# EAGLE board board (EAGLE 6.5.0)
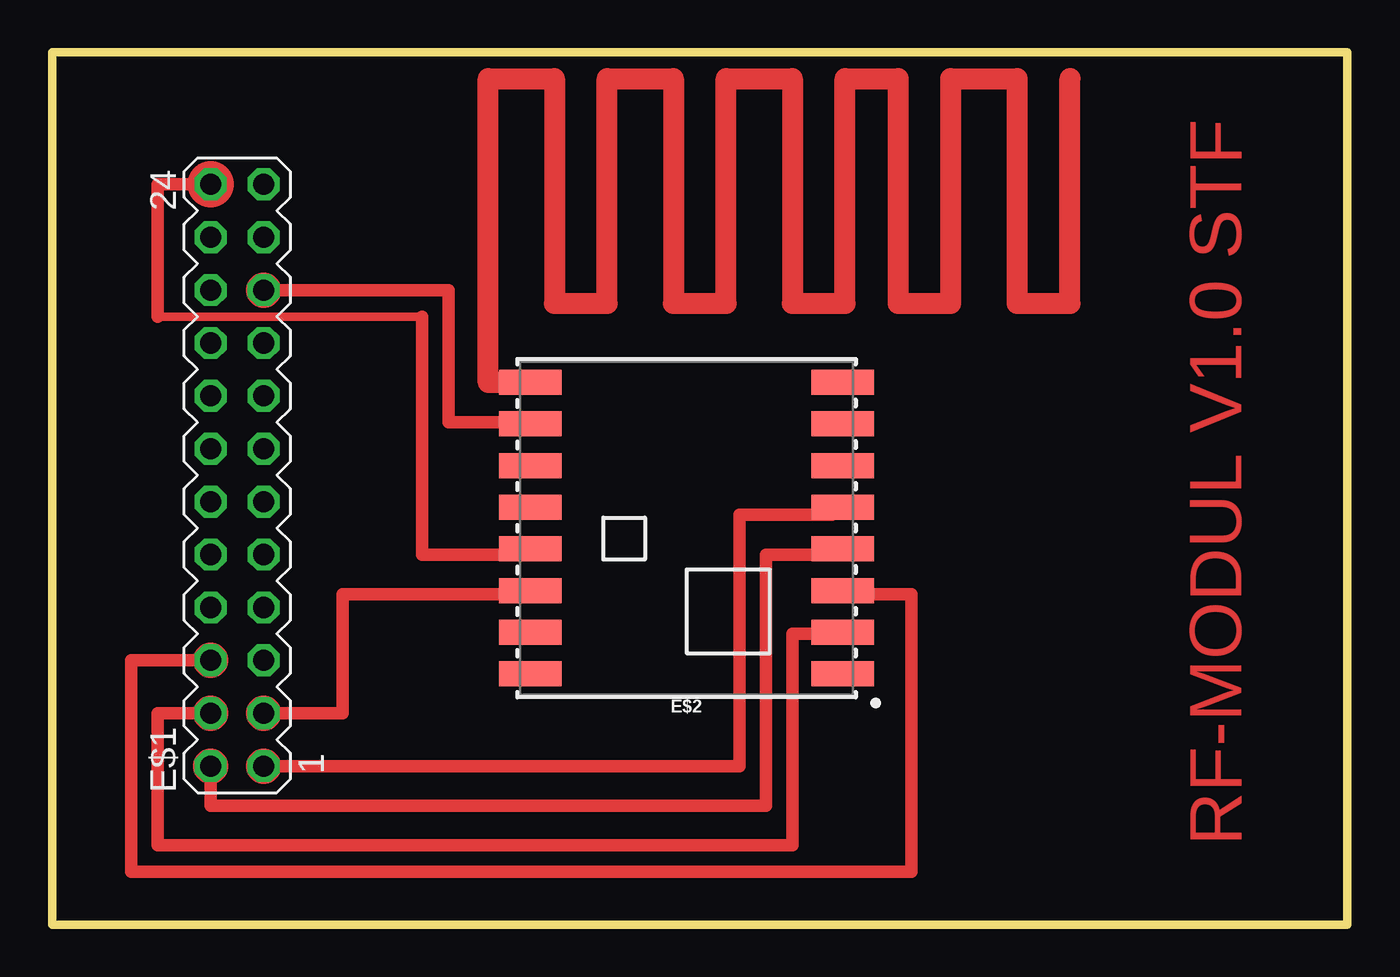
[diagram p0: board, top side]

Size 62.23 x 41.91 mm. Coordinates in mm from the lower left corner, seen from the top.
Outline: 0,41.91 0,0 62.23,0 62.23,41.91 0,41.91
Copper layers (1*16): Top 0.035mm / dielectric 1.5mm / Bottom 0.035mm
Design rules "default": minimum track width 10mil, minimum drill 24mil, track to track 8mil, track to pad 8mil, pad to pad 8mil, via to via 8mil, smd to smd 8mil, copper to edge 40mil, drill to drill 8mil, minimum pad ring 10mil, minimum via ring 8mil, stop-mask expansion 4mil, vias tented up to drill 0mil, thermal gap 10mil

## Footprints (pad centres in the part's own frame; a part is rotated, then mirrored left to right if it is on the bottom)
MA12-2 = drill 1.016 octagon: 1 -13.97,-1.27; 2 -13.97,1.27; 3 -11.43,-1.27; 4 -11.43,1.27; 5 -8.89,-1.27; 6 -8.89,1.27; 7 -6.35,-1.27; 8 -6.35,1.27; 9 -3.81,-1.27; 10 -3.81,1.27; 11 -1.27,-1.27; 12 -1.27,1.27; 13 1.27,-1.27; 14 1.27,1.27; 15 3.81,-1.27; 16 3.81,1.27; 17 6.35,-1.27; 18 6.35,1.27; 19 8.89,-1.27; 20 8.89,1.27; 21 11.43,-1.27; 22 11.43,1.27; 23 13.97,-1.27; 24 13.97,1.27
RFM69HCW-XXXS2 = smd 3 x 1.2: 1 -7.5,7; 2 -7.5,5; 3 -7.5,3; 4 -7.5,1; 5 -7.5,-1; 6 -7.5,-3; 7 -7.5,-5; 8 -7.5,-7; 9 7.5,-7; 10 7.5,-5; 11 7.5,-3; 12 7.5,-1; 13 7.5,1; 14 7.5,3; 15 7.5,5; 16 7.5,7

## Placement (x,y rotation side)
E$1  [MA12-2]  8.89,21.59 90 top
E$2  [RFM69HCW-XXXS2]  30.48,19.05 180 top

## Library data of the parts
E$1 = con-lstb
E$2 = SparkFun-RF

## Nets
S$2: E$1.19
S$3: E$1.24
S$4: E$1.3
S$5: E$1.1
S$6: E$1.2
S$7: E$1.4
S$8: E$1.6

## Tracks (layer width: path | path; a pad name or v marks a point on that pad's centre or on a via)
S$1
  Top 1.016: 22.86,26.04 20.96,26.04 20.96,40.64 24.13,40.64 24.13,29.84 26.67,29.84 26.67,40.64 29.85,40.64 29.85,29.84 32.39,29.84 32.39,40.64 35.56,40.64 35.56,29.84 38.1,29.84 38.1,40.64 40.64,40.64 40.64,29.84 43.18,29.84 43.18,40.64 46.36,40.64 46.36,29.84 48.89,29.84 48.89,40.64
S$2
  Top 0.61: 22.23,24.13 19.05,24.13 19.05,30.48 E$1.19
S$3
  Top 0.406: 17.78,29.21 5.08,29.21
  Top 0.61: 22.86,17.78 17.78,17.78 17.78,29.21 | 5.08,29.21 5.08,35.56 E$1.24
S$4
  Top 0.61: E$1.3 13.97,10.16 13.97,15.87 22.86,15.87
S$5
  Top 0.61: E$1.1 33.02,7.62 33.02,19.68 37.47,19.68
S$6
  Top 0.406: 37.47,17.78 37.47,18.41
  Top 0.61: E$1.2 7.62,5.71 34.29,5.71 34.29,17.78 37.47,17.78
S$7
  Top 0.61: E$1.4 5.08,10.16 5.08,3.81 35.56,3.81 35.56,13.97 37.47,13.97
S$8
  Top 0.61: E$1.6 3.81,12.7 3.81,2.54 41.28,2.54 41.28,15.87 38.1,15.87
(copper drawn outside any net)
  shapes: Top circle x7

## Text on the board
Top: RF-MODUL V1.0 STF